# Altium PCB PCB4302.PcbDoc (part 2 of 2)
Units mil, origin at the board's own origin, x right, y up, seen from the top; angles counter-clockwise.
Board outline 1574.8 x 1476.38 mil, 4 copper layers (Top, Inner Layer 2, Inner Layer 3, Bottom), stack 35.4 mil thick; 37 components, 68 nets, 208 pads, 290 vias.
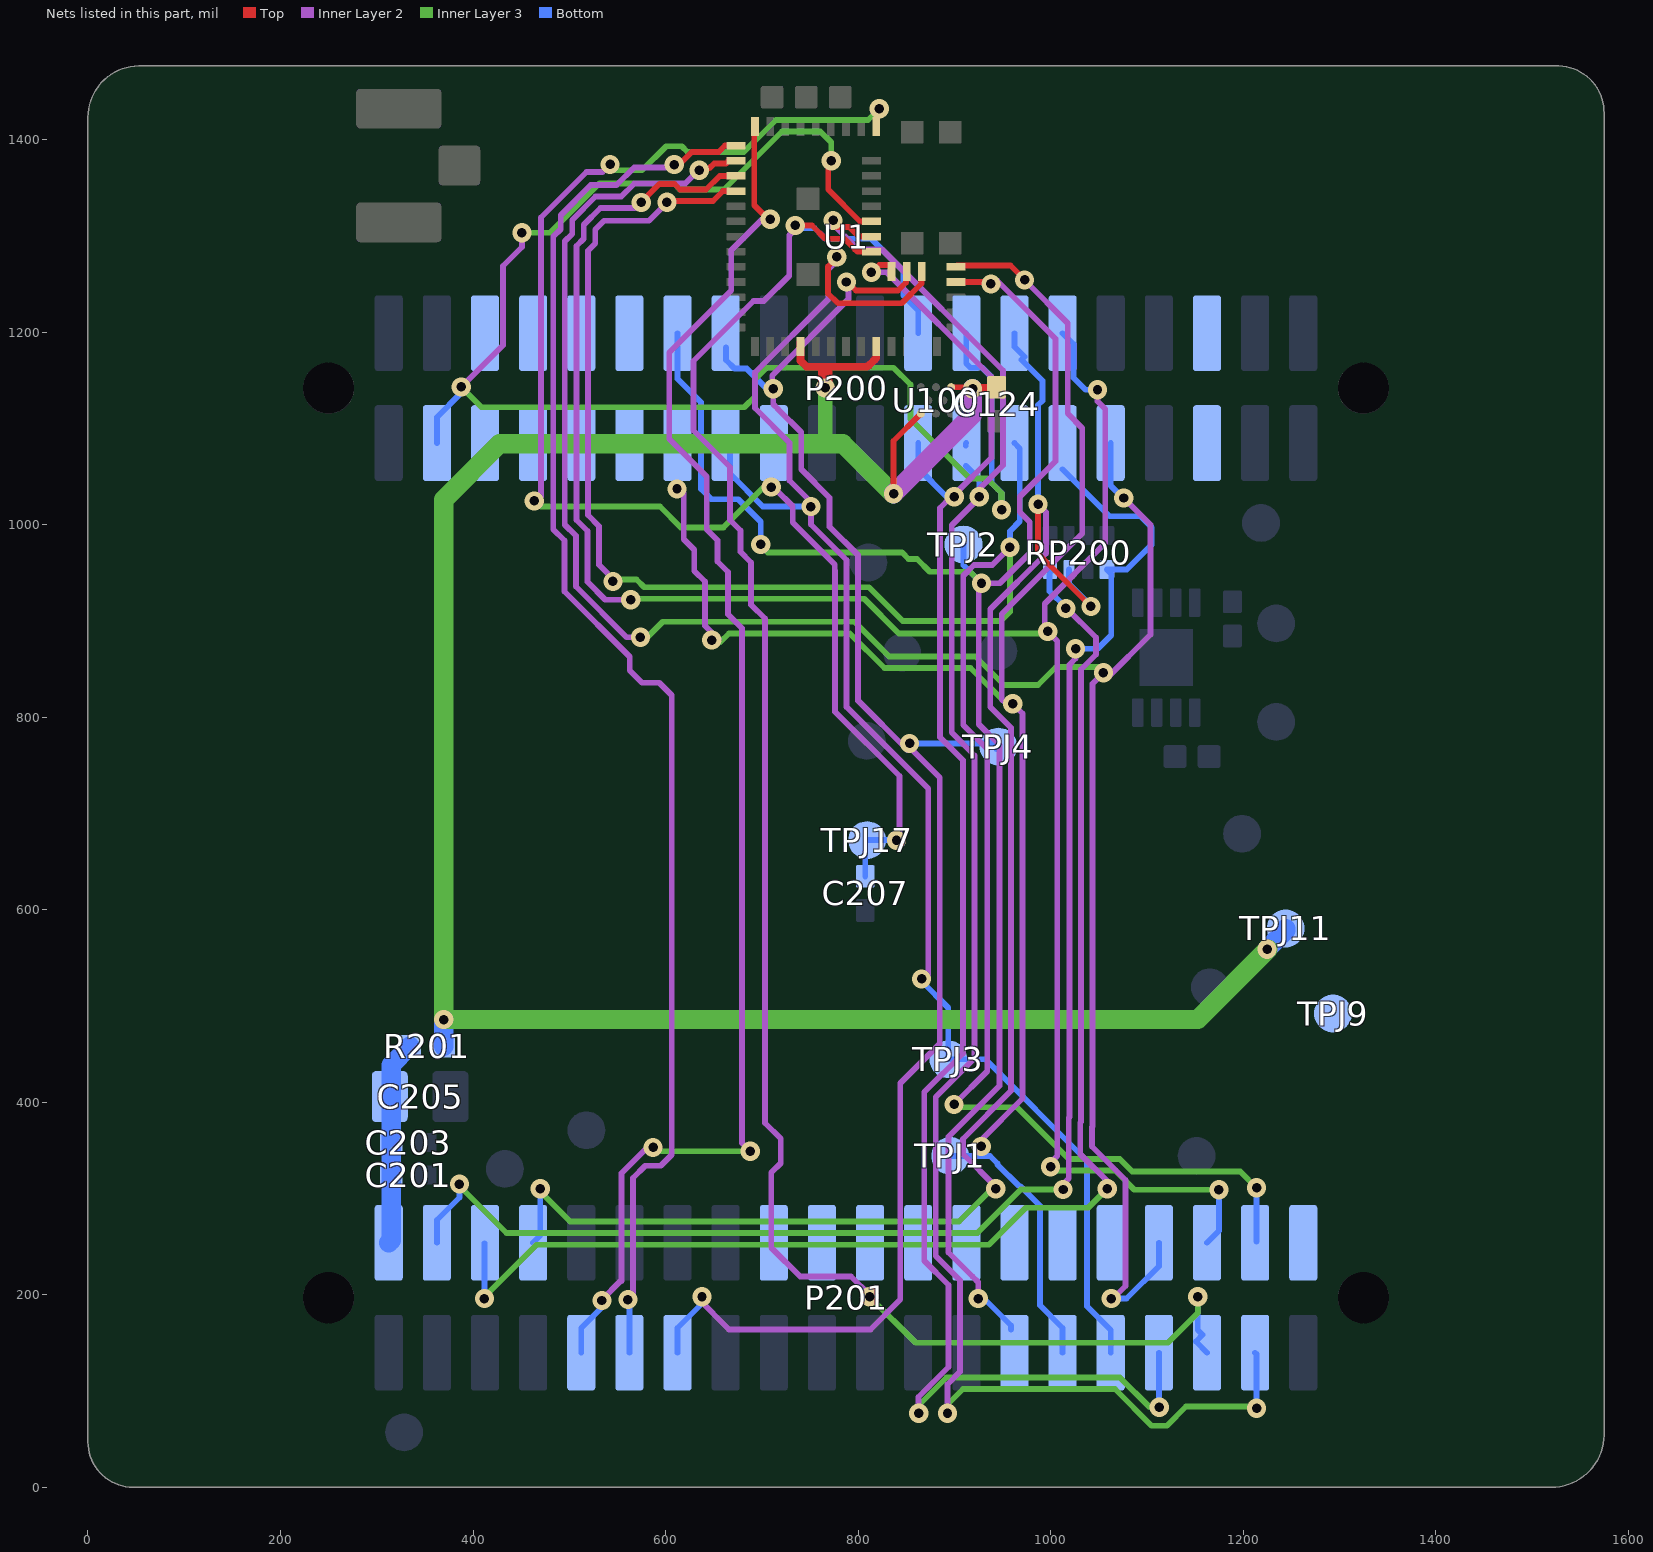
[diagram p4: the nets of this part, all layers, seen from the top]

## Via types
v1: diameter 20, hole 9.84, Top to Bottom, tented both sides, 290 vias

## Nets (pads, with @x,y where several pads share a name; then routed paths per layer and width w, separated by ;. In a path a pad name is that pad's centre, name@x,y a point inside that pad or via, vN(x,y) a via of type N, cw(c..) or ccw(c..) an arc to the next point about the centre after c; other vN are vias at no path point) (continued)
RADIO_PD11: P201.9 U1.9 | length 1515.5
  Top w6: U1.9@692.91,1420 U1.9@692.91,1413.39 692.07,1412.54 692.07,1370.29 692.07,1369.87 692.07,1331.64 v1@707.57,1316.14
  Inner Layer 2 w6: v1(533.85,194) 533.85,194.87 552.98,214 553.85,214 554.13,214.28 554.13,326.12 581.01,353 v1(587,353) ; v1(688,349) 679.32,357.68 679.32,368.43 679.28,368.47 679.28,892.41 664.85,906.84 664.85,950.75 653.85,961.75 653.85,983.81 642.85,994.81 642.85,1049.84 603.85,1088.84 603.85,1178.89 668.2,1243.24 668.2,1284.99 v1@700.41,1317.2 ; v1@700.42,1317.19 v1(708.63,1317.19) 708.63,1316.03 v1@709.8,1317.2
  Inner Layer 3 w6: v1(587,353) 591,349 v1(688,349)
  Bottom w6: P201.9@512.4,139.76 512.4,165.55 533.85,187 v1(533.85,194)
RADIO_PD12: P201.11 U1.10 | length 1487.9
  Top w6: v1@607.92,1375 615.13,1375 627.27,1387.14 655.14,1387.14 661.7,1393.7 U1.10@673.23,1393.7
  Inner Layer 2 w6: v1(560.85,195) 566.13,200.28 566.13,321.15 578.98,334 594.87,334 606.3,345.43 606.3,822.83 593.5,835.63 575.55,835.63 562.71,848.47 562.71,862.76 494.85,930.62 494.85,983.44 483.35,994.94 483.35,1299.26 490.99,1306.91 490.99,1321.43 522.3,1352.74 549.06,1352.74 567.38,1371.06 606.06,1371.06 v1(609,1374)
  Bottom w6: v1(560.85,195) 562.4,193.45 P201.11@562.4,139.76
RADIO_PD13: P200.31 P201.34 U1.11 | length 2238.3
  Top w6: 645.43,1370.08 650.49,1375.14 662.64,1375.14 665.45,1377.95 U1.11@673.23,1377.95
  Inner Layer 2 w6: v1(573.85,883) 559.44,883 506.85,935.59 506.85,988.41 495.35,999.91 495.35,1294.29 502.99,1301.94 502.99,1316.46 527.27,1340.74 554.03,1340.74 567.62,1354.33 620.43,1354.33 633.92,1367.82 v1@635.13,1367.82 ; v1(1062.85,196) 1063.85,195 1077.85,209 1077.85,319.09 1042.85,354.09 1042.85,374.02 1043.46,374.62 1043.46,834.61 v1(1054.85,846) 1059.31,841.54 1103.57,885.8 1103.57,999.86 v1(1075.83,1027.61)
  Inner Layer 3 w6: v1(573.85,883) 580.98,883 596.98,899 796.36,899 832.36,863 921.82,863 951.42,833.4 986.95,833.4 1005.54,852 1049.85,852 1054.85,847 v1(1054.85,846)
  Bottom w6: P200.31@1062.4,1084.65 1062.4,1040.45 1075.24,1027.61 v1(1075.83,1027.61) ; v1(1062.85,196) 1078.85,196 1112.4,229.55 P201.34@1112.4,253.94
  other v1: 635,1368
RADIO_PD14: P200.30 P201.36 U1.12 | length 2228.1
  Top w6: v1(574.8,1334.65) 574.8,1334.99 593.53,1353.71 609.27,1353.71 614.96,1348.02 642.08,1348.02 656.26,1362.2 U1.12@672.24,1362.2
  Inner Layer 2 w6: v1(563.85,922) 537.42,921.99 518.85,940.56 518.85,993.38 507.35,1004.88 507.35,1289.32 514.99,1296.96 514.99,1311.49 532.24,1328.74 568.9,1328.74 v1(574.8,1334.65) ; v1(996.85,889) 1006.92,878.94 1006.85,878.87 1006.85,344 999.85,337 v1(999.85,333) ; v1@997.85,889 993.85,893 993.85,917.81 1056.82,980.78 1056.82,1120.03 1048.67,1128.18 v1(1048.67,1140.02)
  Inner Layer 3 w6: v1@571.88,923 806.3,923 842.3,887 996.85,887 v1(996.85,889) ; v1(999.85,333) 1003.85,329 1066.72,329 1086.72,309 v1(1174.85,309)
  Bottom w6: P200.30@1012.4,1198.82 1023.62,1187.6 1023.62,1152.56 1036.17,1140.02 v1(1048.67,1140.02) ; P201.36@1162.4,253.94 1174.85,266.39 v1(1174.85,309)
RADIO_PD15: P200.27 P201.38 U1.13 | length 2188
  Top w6: v1@595.3,1333.94 597.38,1336.02 649.29,1336.02 659.73,1346.46 U1.13@673.23,1346.46
  Inner Layer 2 w6: v1@540.01,949.16 530.85,958.32 530.85,998.35 519.35,1009.85 519.35,1284.35 526.99,1291.99 526.99,1306.52 536.12,1315.65 582.67,1315.65 593.3,1326.28 593.45,1326.28 v1@601.64,1334.46 ; v1(899.64,397.66) 934.06,432.07 934.06,766.82 909.15,791.73 909.15,946.85 920.28,957.98 939.27,957.98 v1(957.71,976.43)
  Inner Layer 3 w6: v1@551.85,943 569.72,943 577.72,935 811.27,935 846.31,899.96 948.19,899.96 957.71,909.49 v1(957.71,976.43) ; v1(899.64,397.66) 902.61,394.68 965.04,394.68 1018.72,341 1071.69,341 1084.69,328 1196.85,328 v1(1213.85,311)
  Bottom w6: v1(957.71,976.43) 957.71,993.15 967.94,1003.38 967.94,1079.1 P200.27@962.4,1084.65 ; P201.38@1213.85,255.39 v1(1213.85,311)
  other v1: 545.29,940.99 601.4,1334.71
RADIO_PF0: P200.14 P201.27 TPJ2.1 U1.39 | length 1836.2
  Top w6: U1.39@901.57,1251.97 v1@937.01,1251.97
  Inner Layer 2 w6: 918.81,218.96 893.85,243.91 893.85,364.12 946.85,417.12 946.85,771 925.2,792.65 925.2,934.57 928.15,937.53 v1(928.15,938.98) 947.14,938.98 978.35,970.19 978.35,1002.75 967.94,1013.15 967.94,1028.89 1004.92,1065.86 1004.92,1192.93 v1@944.85,1253 ; 918.85,219 924.85,213 v1(924.85,196)
  Inner Layer 3 w6: v1@697.83,979.33 706.17,971 845.71,971 852.4,964.32 861.19,964.32 874.5,951 916.13,951 v1(928.15,938.98) v1@922.15,938.98
  Bottom w6: P200.14@612.4,1198.82 612.4,1151.45 636.85,1127 636.85,1037 647.46,1026.39 675.38,1026.39 689.96,1011.81 698.82,1002.95 v1(698.82,979.33) ; TPJ2.1@909.45,979.25 909.45,957.68 v1(928.15,938.98) ; v1(924.85,196) 930.85,196 958.85,168 P201.27@958.85,164
  other v1: 937.99,1250
RADIO_PF1: P200.13 P201.29 TPJ1.1 U1.40 | length 1855
  Top w6: U1.40@901.57,1267.72 902.86,1269 958.36,1269 v1@973.43,1253.94
  Inner Layer 2 w6: v1(611.85,1037) 614.85,1037 618.85,1033 618.85,984.87 629.85,973.87 629.85,951.81 640.85,940.81 640.85,895 654.85,881 653.85,880 v1(647.85,880) ; v1(927.85,354) 927.85,360.84 970.85,403.84 970.85,803.83 v1(960.67,814.02) ; 950.85,817 949.2,818.65 949.2,907.1 1032.82,990.72 1032.82,1100.19 1017.67,1115.34 1017.67,1209.18 v1@973.85,1253
  Inner Layer 3 w6: v1@656.85,878 665.85,887 791.39,887 827.39,851 916.85,851 953.83,814.02 v1(960.67,814.02)
  Bottom w6: TPJ1.1@895.67,344.21 937.08,344.21 944.85,336.45 944.85,335.13 967.29,312.69 968.6,312.69 988.83,292.46 988.83,189.02 1012.4,165.45 P201.29@1012.4,139.76
  other v1: 972.89,1254.19
RADIO_PF2: P200.15 P201.31 TPJ3.1 U1.41 | length 1641.3
  Top w6: v1@777.85,1277 768.84,1267.99 768.84,1240.02 778.99,1229.87 845.2,1229.87 865.85,1250.52 865.85,1266.29 U1.41@866.14,1266.58
  Inner Layer 2 w6: v1@750.98,1017.72 v1@750.98,1018.75 ; v1(777.85,1278) 777.85,1273.91 768.85,1264.91 768.85,1234 692.85,1158 692.85,1121 728.85,1085 728.85,1045.76 751.01,1023.59 v1(751.01,1018.75) ; v1(865.85,528) 869.85,528 872.85,531 872.85,725.81 788.01,810.66 788.01,963.21 751.01,1000.21 v1(751.01,1018.75)
  Bottom w6: P200.15@666.85,1072 666.85,1053 700.96,1018.89 749.81,1018.89 v1@750,1018.7 ; v1(865.85,528) 865.85,526 893.7,498.15 TPJ3.1@893.7,444.61 932.24,444.61 1037.85,339 1037.85,188 1062.4,163.45 P201.31@1062.4,139.76
RADIO_PF3: P200.16 P201.13 TPJ4.1 U1.42 | length 1738.1
  Top w6: v1@793.31,1253.94 793.98,1253.27 790.85,1250.14 790.85,1250 797.74,1243.11 841.47,1243.11 849.85,1251.49 U1.42@849.85,1260
  Inner Layer 2 w6: v1(637.82,197.84) 635.69,197.84 633.85,196 665.85,164 812.85,164 843.85,195 843.85,419.65 884.85,460.65 884.85,737.2 856.21,765.84 851.29,765.84 800.01,817.12 800.01,968.19 770.37,997.82 770.37,1027.86 740.85,1057.38 740.85,1095.84 716.77,1119.92 ; v1(711.85,1141) 711.85,1125 716.85,1120 ; v1@711.85,1142 710.85,1143 710.85,1155 789.86,1234.01 v1@789.86,1251.13
  Bottom w6: P201.13@612.4,139.76 612.4,165.55 637.82,190.97 v1(637.82,197.84) ; P200.16@662.85,1184 662.85,1171 671.85,1162 684.26,1162 v1@708.26,1138 ; v1(853.38,772.68) 930.38,772.68 934.28,776.57 943.85,767 TPJ4.1@944.85,768
  other v1: 787.85,1252
RADIO_PF4: P200.23 P201.33 U1.43 | length 1767.6
  Top w6: v1@812.17,1260 821.85,1269.69 834.65,1269.69 U1.43@834.65,1262.8 ; v1@813.85,1261.69 v1(813.85,1262.11)
  Inner Layer 2 w6: v1(813.85,1262.11) 829.74,1262.11 938.6,1153.25 938.6,1069.75 v1@899.85,1031 ; v1(862.85,77) 862.85,93.84 893.85,124.84 893.85,209.97 868.61,235.21 868.61,410.46 908.85,450.71 908.85,755.28 885.15,778.98 885.15,1017.3 896.85,1029 v1(899.85,1029)
  Inner Layer 3 w6: v1(862.85,77) 862.85,85 891.85,114 1071.85,114 1102.85,83 v1(1112.85,83)
  Bottom w6: P200.23@862.4,1084.65 862.4,1058.45 892.35,1028.5 892.85,1029 v1(899.85,1029) ; P201.33@1112.4,139.76 1112.4,83.45 v1(1112.85,83)
RADIO_PF5: P200.24 P201.35 U1.44 | length 2029.7
  Top w6: v1(734.63,1310.77) 752.02,1310.77 765.79,1297 785.72,1297 796.85,1285.87 ; 796.85,1285.83 799.21,1283.46 U1.44@813.98,1283.46
  Inner Layer 2 w6: v1(734.63,1310.77) 734.63,1306.8 728.4,1300.58 728.35,1300.63 728.35,1258.6 702.03,1232.28 691.18,1232.28 628.85,1169.95 628.85,1097.78 666.85,1059.78 666.85,1004.75 677.85,993.75 677.85,971.69 688.85,960.69 688.85,916.78 703.28,902.35 703.28,378.41 719.52,362.17 719.52,336.68 709.85,327.01 709.85,248.91 739.76,219 792.72,219 811.85,199.87 v1(811.85,198)
  Inner Layer 3 w6: v1(811.85,198) 859.85,150 1121.85,150 1152.85,181 v1(1152.85,198)
  Bottom w6: v1@734.16,1308.07 754.72,1308.07 765.79,1297 781.87,1297 813.61,1297.01 846.85,1263.77 846.85,1238 862.4,1222.45 P200.24@862.4,1198.82 ; v1(1152.85,198) 1152.85,163.32 1157.85,158.32 1150.85,151.32 P201.35@1162.4,139.76
RADIO_PF6: P200.25 P201.37 U1.45 | length 1908.1
  Top w6: v1@771.65,1312.01 774.66,1309 790.69,1309 800.48,1299.21 U1.45@813.98,1299.21
  Inner Layer 2 w6: v1(774,1316) 773.15,1316 770.89,1313.76 770.89,1314.96 799.85,1286 824.62,1286 950.6,1160.03 950.6,1061.75 924.85,1036 928.85,1032 928.85,1031 897.15,999.3 897.15,783.95 920.85,760.25 920.85,445.74 880.61,405.49 880.61,240.18 905.85,214.94 905.85,119.87 892.85,106.87 v1(892.85,77)
  Inner Layer 3 w6: v1(892.85,77) 892.85,86 908.85,102 1066.88,102 1104.88,64 1120.72,64 1140.72,84 1211.85,84 v1(1213.85,82)
  Bottom w6: P200.25@911.85,1061 925.85,1047 v1(925.85,1029) ; P200.25@911.85,1082 911.85,1084.09 P200.25@912.4,1084.65 ; P201.37@1212.4,139.76 1213.85,138.32 v1(1213.85,82)
RADIO_PF7: P200.3 P200.26 U1.46 | length 1634
  Top w6: v1@769.23,1377.3 768.98,1377.06 768.98,1347.97 801.99,1314.96 U1.46@813.98,1314.96 U1.46@814.96,1314.96
  Inner Layer 2 w6: v1(387.85,1143) 431.1,1186.25 431.1,1268.7 450.79,1288.39 v1(450.79,1303.15)
  Inner Layer 3 w6: v1(387.85,1143) 408.85,1122 681.72,1122 692.85,1133.13 692.85,1151 704.85,1163 836.72,1163 854.29,1145.44 854.29,1109.56 915.85,1048 933.72,1048 944.72,1037 944.85,1037 948.95,1032.91 v1(948.95,1015.33) ; v1(450.79,1303.15) 480.03,1303.15 531.21,1354.33 608.65,1354.33 609.27,1353.71 ; 608.58,1353.71 609.27,1353.71 ; v1(772,1378) 772,1397.17 760.77,1408.41 720.94,1408.41 660.72,1348.19 614.79,1348.19 609.27,1353.71
  Bottom w6: P200.3@362.4,1084.65 362.4,1111.55 387.85,1137 v1(387.85,1143) ; P200.26@912.4,1198.82 912.4,1167.45 916.85,1163 928.85,1163 938.83,1153.02 938.83,1043.24 948.95,1033.13 v1(948.95,1015.33)
USB_VBUS: P200.35
USB_VREG: P200.36
VMCU: C124.1 R201.2 TPJ11.1 U1.26 U1.31 U100.A1 U100.E3 | length 2476.3
  Top w6: v1(836.85,1032) 836.85,1086.97 U100.E3@865.1,1115.22 ; U100.A1@896.6,1142.78 v1@917.07,1142.78
  Top w8: U1.26@740.16,1188.83 740.16,1170.28 746.43,1164 809.6,1164 810.79,1165.2 811.23,1165.2 817.09,1171.05 817.09,1171.49 818.6,1173 818.9,1173 U1.31@818.9,1185.04
  Top w10: v1(918.85,1141) C124.1@946.13,1141
  Top w15: v1(765.85,1142) 765.85,1160
  Inner Layer 2 w20: v1(836.85,1032) 918.85,1114 v1(918.85,1141)
  Inner Layer 3 w15: 765.85,1084 v1(765.85,1142) v1@765.85,1143
  Inner Layer 3 w20: v1(836.85,1032) 836.11,1032 784.11,1084 765.85,1084 427.5,1084 369.68,1026.18 v1(369.68,485.83) 1152.68,485.83 1225.85,559 v1(1224.85,559)
  Bottom w20: R201.2@369.68,457.99 v1(369.68,485.83) ; v1(1224.85,559) 1244.09,578.24 TPJ11.1@1244.09,580.43
VMCU_IN: C201.1 C203.1 C205.1 P201.2 R201.1 | length 213.1
  Bottom w20: P201.2@312.4,253.94 314.96,256.49 C201.1@314.96,324.14 C203.1@314.96,357.99 314.96,438.7 R201.1@334.25,457.99
VRF: TPJ9.1
VRF_IN: P201.40
WSTK_F4: C207.1 P200.17 TPJ17.1 U1.1 | length 1479.8
  Inner Layer 2 w6: v1@463.58,1022.64 470.47,1029.53 470.47,1318.9 517.72,1366.14 534.4,1366.14 v1(542.34,1374.08) ; v1(709.85,1039) 707.38,1036.53 714.46,1036.53 732.01,1018.97 732.01,1002.24 775.78,958.47 775.78,952.57 776.01,952.34 776.01,805.69 842.85,738.84 v1@842.85,673
  Inner Layer 3 w6: v1(463.58,1024.61) 463.58,1022.64 465.06,1024.11 470.47,1018.7 594.15,1018.7 615.85,997 660.01,997 702.01,1039 v1(709.85,1039) ; v1@541.34,1374.02 547.35,1368 575.61,1368 600.62,1393.02 616.85,1393.02 622.85,1387.02 681.25,1387.02 714.64,1420.41 810.26,1420.41 v1(821.85,1432)
  Bottom w6: C207.1@807.4,634.57 807.4,670.28 TPJ17.1@809.35,672.23 v1@837.62,672.23
  other v1: 839.85,672
WSTK_F15: P200.28 P201.8 RP200.7 | length 1723
  Top w6: v1(986.94,1021.02) 986.94,969.91 v1(1041.85,915)
  Inner Layer 2 w6: v1(942.85,310) 942.85,312.13 908.85,346.13 908.85,361.87 958.85,411.87 958.85,788.96 937.2,810.62 937.2,912.07 995.08,969.95 995.08,1012.88 v1(986.94,1021.02)
  Inner Layer 3 w6: v1(469.85,310) 466.85,310 500.85,276 904.85,276 941.85,313 942.85,312 v1(942.85,310)
  Bottom w6: P201.8@462.4,253.94 469.85,261.39 v1(469.85,310) ; P200.28@962.4,1198.82 962.4,1184.82 972.85,1174.37 969.61,1171.13 991.44,1149.31 991.44,1128.64 986.94,1124.15 v1(986.94,1021.02) ; RP200.7@1019.01,953.28 1019.01,938.84 1041.85,916 v1(1041.85,915)
WSTK_F16: P200.29 P201.4 RP200.5 | length 1613.8
  Inner Layer 2 w6: v1(1012.93,309.31) 1012.93,311.22 1011.15,313 1018.85,320.7 1018.85,383.96 1019.46,384.56 1019.46,854.51 1025.85,860.9 v1(1025.85,871)
  Inner Layer 3 w6: v1(385.85,315) 384.85,314 434.85,264 923.72,264 969.03,309.31 v1(1012.93,309.31)
  Bottom w6: P201.4@362.4,253.94 362.4,277.55 385.85,301 v1(385.85,315) ; P200.29@1012.4,1057.45 1061.24,1008.61 1093.24,1008.61 1104.85,997 1104.85,979 1079.13,953.28 RP200.5@1058.38,953.28 1062.85,948.81 1062.85,885 1048.85,871 v1(1025.85,871)
WSTK_P3: P201.6 RP200.8 | length 1434.1
  Inner Layer 2 w6: v1(1015.85,912.94) 1016.75,912.94 1046.98,882.71 1046.98,865 1031.46,849.48 1031.46,379.59 1030.85,378.99 1030.85,346 1058.85,318 v1(1058.85,310)
  Inner Layer 3 w6: v1(411.85,196) 411.85,198 465.85,252 935.85,252 974.16,290.31 1039.16,290.31 v1(1058.85,310)
  Bottom w6: v1(411.85,196) P201.6@411.85,253.39 ; RP200.8@1000.86,951.75 998.84,949.74 998.84,930.85 1015.85,913.84 v1(1015.85,912.94)
WSTK_P15: P201.18
WSTK_P17: P201.20
WSTK_P19: P201.22
WSTK_P21: P201.24
WSTK_P23: P201.26
WSTK_P25: P201.28
WSTK_P27: P201.30
WSTK_P29: P201.32
WSTK_P38: P200.5
WSTK_P39: P200.6
WSTK_P40: P200.7
WSTK_P41: P200.8
WSTK_P42: P200.9
WSTK_P43: P200.10
WSTK_P44: P200.11
WSTK_P45: P200.12
pads on no net: P200.M1 P200.M2 P201.M1 P201.M2 RP200.3 RP200.6 TPJ18.1 TPJ19.1 TPJ20.1 U1.28 U1.30 U100.C1 U200.9

## Polygon pours and split planes (outlines as drawn)
GND on Top "GND_TOP" (solid, pour order 8): 21.82,64.94 ccw(c66.5,64.94) 66.5,20.27 1528.11,20.27 ccw(c1526.17,48.94) 1554.85,50.88 1555.12,1419.29 844.46,1419.22 844.46,1454.94 56.82,1454.94 ccw(c56.82,1419.95) 21.82,1419.94
GND on Inner Layer 3 "GND_L3" (solid, pour order 7): 21.82,64.94 ccw(c66.5,64.94) 66.5,20.27 1528.11,20.27 ccw(c1526.17,48.94) 1554.85,50.88 1555.12,1419.29 844.46,1419.22 844.46,1454.94 56.82,1454.94 ccw(c56.82,1419.95) 21.82,1419.94
GND on Inner Layer 2 "GND_L2" (solid, pour order 6): 21.82,64.94 ccw(c66.5,64.94) 66.5,20.27 1528.11,20.27 ccw(c1526.17,48.94) 1554.85,50.88 1555.12,1419.29 844.46,1419.22 844.46,1454.94 56.82,1454.94 ccw(c56.82,1419.95) 21.82,1419.94
GND on Bottom "GND_Bottom" (solid, pour order 5): 21.82,64.94 ccw(c66.5,64.94) 66.5,20.27 1528.11,20.27 ccw(c1526.17,48.94) 1554.85,50.88 1555.12,1419.29 844.46,1419.22 844.46,1454.94 56.82,1454.94 ccw(c56.82,1419.95) 21.82,1419.94

## Keep-outs
Keep-Out Layer:
  lines w1: 0,54 0,1426.18 ; 0,54.05 ccw(c52.94,52.94) 53.96,0 ; 0.07,1425.2 cw(c51.46,1425.09) 48.23,1476.38 1527.56,1476.38 cw(c1522.33,1424.01) 1574.76,1419.42 ; 149.61,0 1330.85,0 ; 1527.67,-0.01 ccw(c1518.81,55.29) 1574.8,56.17 ; 1574.8,56.23 1574.8,1426.18

## Other copper
Top:
  region: 352.85,759
  region: 303.85,799
  pour cut-out: 780.85,1418 780.85,1407 810.85,1407 810.85,1418
  pour cut-out: 807.85,1427 807.85,1282 829.85,1282 829.85,1427
Inner Layer 2:
  pour cut-out: 277,1411 362,1411 362,1399 413,1399 413,1347 362,1347 362,1335 277,1335
Bottom:
  pour cut-out: 339.85,394.73 333.85,394.73 333.85,414.73 339.85,414.73 339.85,394.73

## Silkscreen, mask and mechanical layers (free items; w line width, h text height)
Solder Mask Top:
  lines w39.37: 0,52.13 ccw(c53.33,53.06) 52.4,-0.27 ; 0,53.06 0,1421.26 ; 0.14,1425.33 cw(c51.54,1424.98) 51.18,1476.38 ; 47.24,0 1515.75,0 ; 57.15,1476.07 1527.62,1476.1 ; 1521.18,-0.27 ccw(c1520.81,53.62) 1574.7,53.24 ; 1524.54,1476.44 cw(c1523.65,1425.29) 1574.8,1426.18 ; 1574.8,53.62 1574.8,1429.13
Solder Mask Bottom:
  lines w39.37: 0,53.32 0,1420.28 ; 0.14,1425.34 cw(c51.54,1424.98) 51.18,1476.38 ; 0.39,52.39 ccw(c53.71,53.32) 52.78,0 ; 54.13,1476.38 1524.61,1476.45 ; 55.12,0 1515.75,0 ; 1521.57,-0.01 ccw(c1521.19,53.88) 1575.08,53.51 ; 1524.54,1476.44 cw(c1523.65,1425.29) 1574.8,1426.18 1574.8,53.88
Board_Outline:
  lines w2.99: 0,47.18 ccw(c46.96,46.96) 46.75,0 ; 0,1423.11 cw(c53,1423.38) 52.74,1476.38 ; 1520.21,0 ccw(c1520.4,54.4) 1574.8,54.22 ; 1527.85,1476.38 cw(c1526.72,1428.3) 1574.8,1427.17
  lines w3: -0.15,47.88 -0.85,56.08 -2.95,63.98 -6.45,71.38 -11.15,78.08 -16.85,83.78 -23.55,88.48 -30.95,91.98 -38.85,94.08 -46.95,94.78 -47.75,94.78 -55.95,94.08 -63.85,91.98 -71.25,88.48 -77.85,83.78 -83.65,78.08 -88.35,71.38 -91.85,63.98 -93.95,56.08 -94.65,47.88 -94.65,39.68 -92.65,16.38 -86.55,-6.12 -76.75,-27.32 -63.35,-46.42 -46.85,-62.92 -27.75,-76.32 -6.55,-86.12 15.95,-92.22 39.25,-94.22 1535.25,-94.22 1558.55,-92.22 1581.05,-86.12 1602.25,-76.32 1621.35,-62.92 1637.85,-46.42 1651.25,-27.32 1661.05,-6.12 1667.15,16.38 1669.15,39.68 1669.15,47.88 1668.45,56.08 1666.35,63.98 1662.85,71.38 1658.15,78.08 1652.45,83.78 1645.75,88.48 1638.35,91.98 1630.45,94.08 1622.25,94.78 1621.55,94.78 1613.35,94.08 1605.45,91.98 1598.05,88.48 1591.35,83.78 1585.65,78.08 1580.95,71.38 1577.45,63.98 1575.35,56.08 ; -0.15,1429 -0.85,1420.9 -2.95,1413 -6.45,1405.6 -11.05,1398.9 -16.85,1393.1 -23.55,1388.4 -30.95,1385 -38.85,1382.9 -46.95,1382.2 -47.75,1382.2 -55.95,1382.9 -63.85,1385 -71.25,1388.4 -77.85,1393.1 -83.65,1398.9 -88.35,1405.6 -91.85,1413 -93.95,1420.9 -94.65,1429 -94.65,1437.3 -92.65,1460.5 -86.55,1483.1 -76.75,1504.2 -63.35,1523.3 -46.85,1539.8 -27.75,1553.2 -6.55,1563.1 15.95,1569.1 39.25,1571.1 1535.25,1571.1 1558.55,1569.1 1581.05,1563.1 1602.25,1553.2 1621.35,1539.8 1637.85,1523.3 1651.25,1504.2 1661.05,1483.1 1667.15,1460.5 1669.15,1437.3 1669.15,1429 1668.45,1420.9 1666.35,1413 1662.85,1405.6 1658.15,1398.9 1652.45,1393.1 1645.75,1388.4 1638.35,1385 1630.45,1382.9 1622.25,1382.2 1621.55,1382.2 1613.35,1382.9 1605.45,1385 1598.05,1388.4 1591.45,1393.1 1585.65,1398.9 1580.95,1405.6 1577.45,1413 1575.35,1420.9 ; 0,47.18 0,1423.11 ; 46.75,0 1520.21,0 ; 52.74,1476.38 1527.85,1476.38 ; 1574.8,54.22 1574.8,1427.17
Variant_A_Top_Silk:
  drawing of 24289 lines, arcs and shapes, not listed
  text "BGM121" at 639.85,86 h80
Variant_A_Bottom_Silk:
  text "PCB4302A Rev A03" at 1507.87,992.13 h80 r90
Variant_B_Top_Silk:
  text "_____ Gecko" at 185.85,723 h200
Drill Drawing:
  lines w1: 102.42,-0.27 102.45,-0.27
Bottom_Silk:
  lines w6: 250.25,1284.26 250.25,1244.86 289.55,1244.86 ; 250.25,1426.89 250.25,1466.29 289.55,1466.29 ; 958.85,1245.08 998.03,1245.08 998.03,1285.43 ; 958.85,1461.37 998.25,1461.37 998.25,1421.97
  text "BOARD" at 1055.12,1447.83 h60 r90
  text "INFO" at 1105.31,1413.39 h60 r90
Mechanical 26:
  lines w7.87: -4779.72,-1652.05 -4582.87,-1652.05 ; -4779.72,198.35 -4582.87,198.35 ; -4779.24,2048.74 -4582.87,2048.74 ; -1976.27,-3503.68 -1976.27,-3306.83 ; -1976.27,3779.79 -1976.27,3976.64 ; 830.81,-3503.68 830.81,-3306.83 ; 830.81,3779.79 830.81,3976.64 ; 3633.96,-3503.68 3633.96,-3306.83 ; 3633.96,3779.79 3633.96,3976.64 ; 6243.91,-1652.05 6440.76,-1652.05 ; 6243.91,198.35 6440.76,198.35 ; 6243.91,2048.74 6440.28,2048.74 ; -4779.24,-3503.68 -4779.24,3976.32 6440.76,3976.32 6440.76,-3503.68 -4779.24,-3503.68 ; -4582.87,-3306.83 -4582.87,3779.79 6243.91,3779.79 6243.91,-3306.83 -4582.87,-3306.83
  text "1" at -3484.43,3841.66 h60
  text "2" at -637.69,3841.66 h60
  text "3" at 2220.58,3841.66 h60
  text "4" at 5007.98,3841.66 h60
  text "D" at 6322.57,3088.11 h60
  text "D" at -4705.43,3040.66 h60
  text "C" at -4705.43,1170.79 h60
  text "C" at 6317.57,1170.79 h60
  text "B" at -4705.43,-703.23 h60
  text "B" at 6317.57,-703.23 h60
  text "A" at -4705.43,-2573.31 h60
  text "A" at 6317.57,-2573.31 h60
  text "1" at -3436.43,-3442.34 h60
  text "2" at -637.69,-3442.34 h60
  text "3" at 2208.76,-3442.34 h60
  text "4" at 4992.23,-3442.34 h60
Mechanical 27:
  circle w6: c2937.31,-2462.15 r30
  circle w6: c2937.31,-2462.15 r70
  circle w10: c1678.07,-3031.3 r116.62
  lines w6: 2504.31,-2462.15 2794.31,-2462.15 ; 2847.31,-2462.15 3027.31,-2462.15 ; 2534.31,-2492.15 2763.31,-2532.15 2764.31,-2392.15 2534.31,-2432.15 2534.31,-2492.15
  lines w7.87: 1518.69,-3304.3 1518.69,-2246.83 3094.04,-2246.83 ; 1518.69,-2744.3 6241.69,-2744.3 ; 1519.24,-2601.16 3094.04,-2601.16 ; 2317.69,-3302.3 2317.69,-2747.3 ; 2317.69,-2599.3 2317.69,-2248.3 ; 5456.24,-2743.3 5456.24,-2601.16 ; 5798.95,-2601.16 5798.95,-2246.83 ; 6243.65,-2601.16 3094.04,-2601.16 ; 6243.65,-2246.83 3094.04,-2246.83 ; 3094.04,-2601.16 3094.04,-2246.83
  text "SIZE" at 1597.98,-2325.57 h60
  text "DOC NO" at 3172.78,-2325.57 h60
  text "REV" at 5828.85,-2333 h60
  text "PROJECTION" at 2357.69,-2339.3 h60
  text "A03" at 5833.85,-2519 h100
  text "A4" at 1702.31,-2537.15 h100
  text "PCB4302" at 3271.19,-2537.15 h100
  text "REF" at 1597.98,-2679.9 h60
  text "SHEET" at 5495.62,-2679.9 h60
  text "1 of 2" at 5883.08,-2720.72 h60
  text "This drawing is confidential and is supplied on the express" at 2336.69,-2861.3 h60
  text "condition that it shall not be loaned, copied or disclosed to any" at 2336.69,-2961.3 h60
  text "other person or used for any purpose without the written consent of" at 2336.69,-3061.3 h60
  text "C" at 1654.69,-3071.3 h80
  text "2016" at 1854.69,-3077.3 h100
  text "SILICON LABS" at 2353.69,-3230.3 h100
Mechanical 28:
  lines w7.87: -4776.72,-1655.05 -4579.87,-1655.05 ; -4776.72,195.35 -4579.87,195.35 ; -4776.24,2045.74 -4579.87,2045.74 ; 6246.91,-1655.05 6443.76,-1655.05 ; 6246.91,2045.74 6443.76,2045.74
  lines w8: -4580.87,-3309.83 -4580.87,3776.79 ; -4579.87,-3309.83 6246.91,-3309.83 6246.91,3776.79 -4579.87,3776.79 ; -1973.27,-3506.68 -1973.27,-3309.83 ; -1973.27,3776.79 -1973.27,3973.64 ; 833.81,-3506.68 833.81,-3309.83 ; 833.81,3776.79 833.81,3973.64 ; 3636.96,-3506.68 3636.96,-3309.83 ; 3636.96,3776.79 3636.96,3973.64 ; -4776.24,-3506.68 6443.76,-3506.68 6443.76,3973.32 -4776.24,3973.32 -4776.24,-3506.68
  text "4" at -3441.43,3838.66 h60
  text "3" at -594.69,3838.66 h60
  text "2" at 2263.58,3838.66 h60
  text "1" at 5050.98,3838.66 h60
  text "D" at 6365.57,3085.11 h60
  text "D" at -4662.43,3037.66 h60
  text "C" at -4662.43,1167.79 h60
  text "C" at 6365.57,1104.8 h60
  text "B" at -4662.43,-706.23 h60
  text "B" at 6365.57,-749.54 h60
  text "A" at 6325.47,-2573.31 h60
  text "A" at -4662.43,-2576.31 h60
  text "A" at 6360.57,-2576.31 h60
  text "4" at -3393.43,-3445.34 h60
  text "3" at -594.69,-3445.34 h60
  text "2" at 2245.76,-3445.34 h60
  text "1" at 5035.23,-3445.34 h60
Mechanical 29:
  circle w6: c-1269.72,-2464.68 r30
  circle w6: c-1269.72,-2464.68 r70
  circle w10: c-10.47,-3033.83 r116.62
  lines w6: -1359.72,-2464.68 -1179.72,-2464.68 ; -1126.72,-2464.68 -836.72,-2464.68 ; -1096.72,-2394.68 -1095.72,-2534.68 -866.72,-2494.68 -866.72,-2434.68 -1096.72,-2394.68
  lines w7.87: -4576.05,-2603.69 -1426.45,-2603.69 ; -4576.05,-2249.35 -1426.45,-2249.35 ; -4574.09,-2746.83 148.91,-2746.83 ; -4117.35,-2603.69 -4117.35,-2249.35 ; -3788.65,-2745.83 -3788.65,-2603.69 ; -650.09,-3304.83 -650.09,-2749.83 ; -650.09,-2601.83 -650.09,-2250.83 ; 148.36,-2603.69 -1426.45,-2603.69 ; 148.36,-2249.35 -1426.45,-2249.35 ; 148.91,-3306.83 148.91,-2246.83 ; -1426.45,-2603.69 -1426.45,-2249.35
  text "DOC NO" at -1505.19,-2328.09 h60
  text "SIZE" at 69.61,-2328.09 h60
  text "REV" at -4157.15,-2331 h60
  text "PROJECTION" at -690.09,-2341.83 h60
  text "A03" at -4159.15,-2521 h100
  text "PCB4302" at -1603.6,-2539.68 h100
  text "A4" at -34.72,-2539.68 h100
  text "SHEET" at -3828.02,-2682.43 h60
  text "REF" at 69.61,-2682.43 h60
  text "2 of 2" at -4209.44,-2720.72 h60
  text "This drawing is confidential and is supplied on the express" at -669.09,-2863.83 h60
  text "condition that it shall not be loaned, copied or disclosed to any" at -669.09,-2963.83 h60
  text "other person or used for any purpose without the written consent of" at -669.09,-3063.83 h60
  text "C" at 12.91,-3073.83 h80
  text "2016" at -187.09,-3079.83 h100
  text "SILICON LABS" at -686.09,-3232.83 h100
Mechanical 30:
  lines w7.87: 1518.69,-2246.83 1518.69,-1426.36 6243.1,-1426.36 ; 1518.69,-2091.87 3093.49,-2091.87 ; 1518.69,-1934.39 3093.49,-1934.39 ; 1518.69,-1776.91 3093.49,-1776.91 ; 3093.49,-1934.43 6243.1,-1934.43 ; 3093.49,-1619.43 6243.1,-1619.43 ; 3093.76,-2246.83 3093.76,-1426.36 ; 3093.76,-1425.96 3093.76,-1141.09 6245.06,-1141.09
  text "CUSTOMER" at 3137.13,-1501.83 h50
  text "PROJECT NO" at 1577.13,-1541.83 h60
  text "SILICON LABS" at 3823.82,-1574.8 h98.43
  text "DRAWING TITLE" at 3146.13,-1695.83 h60
  text "BRD4302" at 1627.13,-1716.83 h130
  text "DATE" at 1577.13,-1861.83 h60
  text "BGM121 Radio Board" at 3142.72,-1863.19 h70.87
  text "2016-09-05" at 2297.13,-1901.83 h60
  text "SHEET NAME" at 3138.13,-2016.83 h60
  text "DRAWN" at 1577.13,-2021.83 h60
  text "CHECK" at 1577.13,-2181.83 h60

## Dimensions
149.61,0 to -41.34,1476.38 on Assembly Drawing Top
0,1421.26 to 1574.8,1429.13 on Assembly Drawing Top

## Text inside footprints (layer, text, board x,y; h text height)
P200: Silkscreen Bottom "40" at 1246.4,1183.73 h15.75 r180; Silkscreen Bottom "1" at 310.4,1105.73 h15.75 r180; Silkscreen Bottom "2" at 306.4,1185.73 h15.75 r180
P201: Silkscreen Bottom "2" at 306.4,240.85 h15.75 r180; Silkscreen Bottom "1" at 310.4,160.85 h15.75 r180; Silkscreen Bottom "40" at 1246.4,238.85 h15.75 r180